# Altium PCB PCB2.PcbDoc
Units mm, origin at the board's own origin, x right, y up, seen from the top; angles counter-clockwise.
Board outline 21.59 x 58.8 mm, 2 copper layers (Top Layer, Bottom Layer); 29 components, 21 nets, 92 pads, 18 vias.
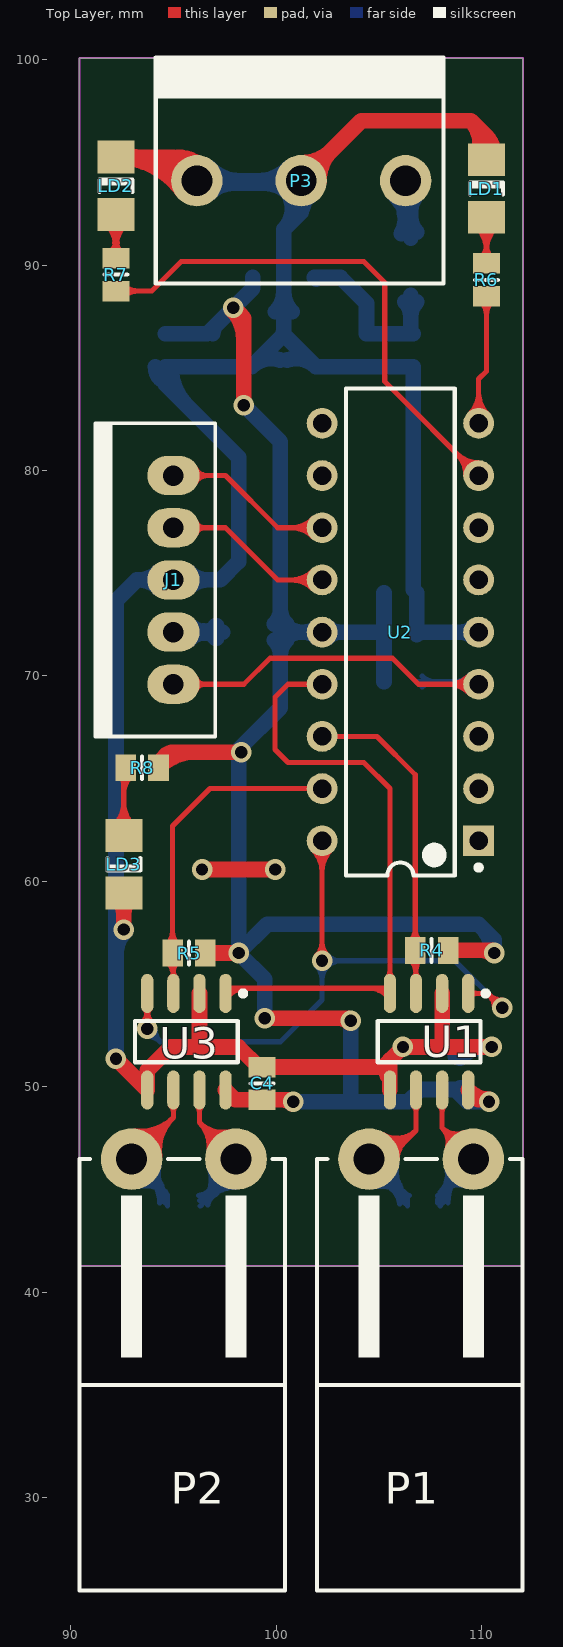
[diagram p0: Top Layer view]
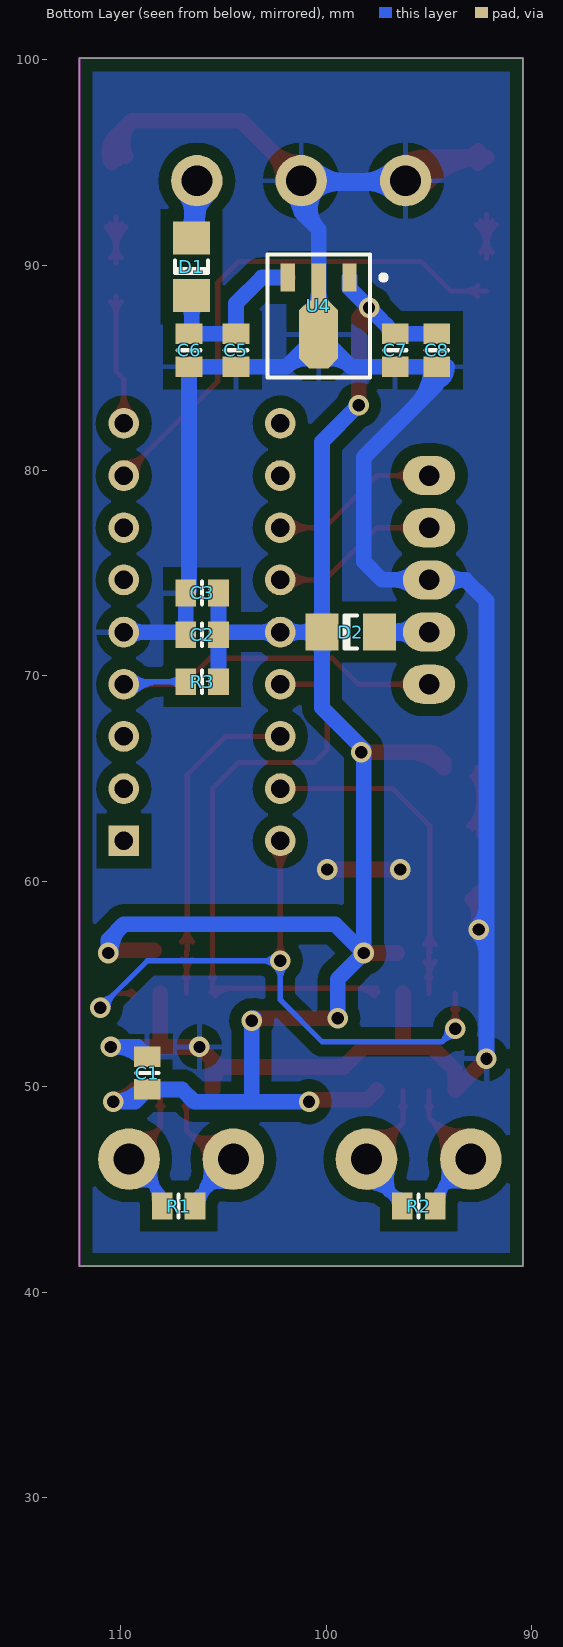
[diagram p1: Bottom Layer view, seen from below]

## Layer stack, top to bottom
Top Layer: signal copper 0.0356
Dielectric: dielectric 0.32, FR-4, Dk 4.8
Bottom Layer: signal copper 0.0356

## Board outline
90.424,100.076 90.424,41.275 112.014,41.275 112.014,100.076

## Design rules (kind name [scope] priority, off if disabled: settings)
Clearance [All] p1: gap=0.6
HoleToHoleClearance [All] p1 off: gap=0.254 allowstackedmicrovias=TRUE
MinimumSolderMaskSliver [All] p1 off: minsoldermaskwidth=0.254
PolygonConnect [All] p1: connectstyle=Relief reliefconductorwidth=0.254 reliefentries=4 polygonreliefangle="90 Angle"
RoutingVias [All] p1: holewidth=0.711 width=1.27 viastyle="Through Hole" minholewidth=0.711 minwidth=1.27 maxholewidth=0.711 maxwidth=1.27
SilkscreenOverComponentPads [All] p1 off: minsilkscreentomaskgap=0.254
SolderMaskExpansion [All] p1: expansion=0.102
Width [All] p1: maxlimit=1.27 minlimit=0.254 preferedwidth=0.254
25 further rules are at their usual default settings.

## Components (designator, comment, footprint, x,y, rotation, side; value= is the part's Value field where it differs from the comment)
C1 "Cap Semi" RESC2012L 108.712,50.673 r270 bottom
C2 "Cap Semi" RESC2012L 106.045,72.009 r180 bottom
C3 "Cap Semi" RESC2012L 106.045,74.041 r180 bottom
C4 "Cap Semi" RESC2012L 99.314,50.165 r270 top
C5 "Cap Semi" RESC2012L 104.394,85.852 r90 bottom
C6 "Cap Semi" RESC2012L 106.68,85.852 r90 bottom
C7 "Cap Semi" RESC2012L 96.647,85.852 r90 bottom
C8 "Cap Semi" RESC2012L 94.615,85.852 r90 bottom
D1 "1n4148" CD3216-1206 106.553,89.916 r270 bottom
D2 "1n4148" CD3216-1206 98.806,72.136 r0 bottom
J1 "programer" CON5 94.996,74.676 r270 top
LD1 "LH N974-KN-1" CD3216-1206 110.236,93.726 r90 top
LD2 "LH N974-KN-1" CD3216-1206 92.202,93.853 r90 top
LD3 "LH N974-KN-1" CD3216-1206 92.583,60.833 r270 top
P1 "Header 2" CON2 107.061,46.482 r0 top
P2 "Header 2" CON2 95.504,46.482 r0 top
P3 "" CONP3 96.139,94.107 r0 top
R1 "Res3" RESC2012L 107.188,44.196 r0 bottom
R2 "Res3" RESC2012L 95.504,44.196 r0 bottom
R3 "Res3" RESC2012L 106.045,69.723 r0 bottom
R4 "Res3" RESC2012L 107.569,56.642 r180 top
R5 "Res3" RESC2012L 95.758,56.515 r180 top
R6 "Res3" RESC2012L 110.236,89.281 r90 top
R7 "Res3" RESC2012L 92.202,89.535 r90 top
R8 "Res3" RESC2012L 93.472,65.532 r180 top
U1 "MAX485ESA" NSO8_L 107.442,52.197 r270 top
U2 "PIC18F1220-E/P" PDIP300-P18 106.045,72.136 r180 top
U3 "MAX485ESA" NSO8_L 95.631,52.197 r270 top
U4 "µA78L05ACPKR" PK03 100.368,88.011 r180 bottom

## Footprints (in the part's own frame and the unit in brackets; to place one, negate y for a bottom-side part, rotate by r counter-clockwise, add the part's x,y. Pads: shape width x height; smd on the part's side, far side on the other; paste and mask are expansions set on the pad)
CD3216-1206 [mm] "Chip Diode; Body 3.2 x 1.6 mm (LxW typ)"
  rect 1.6x1.8 smd: 1(-1.4,0) 2(1.4,0)
  silkscreen extent -0.3,-0.8 0.3,0.8
CON2 [mm]
  round 3 hole 1.5: 1(-2.54,0) 2(2.54,0)
  silkscreen extent -5.08,-21 4.92,0
CON5 [mm]
  oval 1.905x2.54 hole 1: 1(5.08,0) 2(2.54,0) 3(0,0) 4(-2.54,0) 5(-5.08,0)
  silkscreen extent -7.62,-3.81 7.62,2.03
CONP3 [mm]
  round 2.5 hole 1.5: 1(0,0) 2(5.08,0) 3(10.16,0)
  silkscreen extent -2,-5 12,6
NSO8_L [mm] "SOIC, 8-Leads, Body 4.9x3.9mm, Pitch 1.27mm, IPC High Density"
  oval 1.9x0.6 smd: 1(-2.35,1.905) 2(-2.35,0.635) 3(-2.35,-0.635) 4(-2.35,-1.905) 5(2.35,-1.905) 6(2.35,-0.635) 7(2.35,0.635) 8(2.35,1.905)
  silkscreen extent -2.47,-2.5 1,2.88, body extent -2,-2.5 2,2.5, height 1.75
PDIP300-P18 [mm] "DIP, 18-Leads, Row Spacing 7.62mm, Pitch 2.54mm, Body 22.9x6.6mm"
  rect 1.5x1.5 hole 0.9: 1(-3.81,10.16)
  round 1.5 hole 0.9: 2(-3.81,7.62) 3(-3.81,5.08) 4(-3.81,2.54) 5(-3.81,0) 6(-3.81,-2.54) 7(-3.81,-5.08) 8(-3.81,-7.62) 9(-3.81,-10.16) 10(3.81,-10.16) 11(3.81,-7.62) 12(3.81,-5.08) 13(3.81,-2.54) 14(3.81,0) 15(3.81,2.54) 16(3.81,5.08) 17(3.81,7.62) 18(3.81,10.16)
  silkscreen extent -3.94,-11.85 2.65,11.85, body extent -3.6,-11.8 3.6,11.8, height 5.34
PK03 [mm] "SOT-89; Body 4.6 x 4.25 mm, inc. leads (LxW max)"
  rect 0.7x1.35 smd: 1(1.5,1.388) 3(-1.5,1.388)
  rect 0.7x1.8 smd: 2(0,1.162)
  oct 1.9x3.3 smd: 4(0,-1.388)
  silkscreen extent -2.5,-3.49 3.27,2.51
RESC2012L [mm] "Chip Resistor, Body 2.0x1.3mm, IPC High Density"
  rect 1x1.3 smd: 1(-0.8,0) 2(0.8,0)
  silkscreen extent 0,-0.55 0,0.55, body extent -1.07,-0.7 1.07,0.7, height 0.65

## Part data
C1 C2 C3 C4 C5 C6 C7 C8: "Capacitor (Semiconductor SIM Model)"
D1 D2: library part 1N4148_SMD, "Schottky Diode"
J1: library part CON5, "Connector"
LD1 LD2 LD3: library part LEDRED1206, "LED CHIPLED 645NM RED DIFF 1206"
P1 P2: "Header, 2-Pin"
P3: library part "Header 3", "Header, 3-Pin"
R1 R2 R3 R4 R5 R6 R7 R8: "Resistor"
U1 U3: "Low-Power, Slew-Rate-Limited RS-485/RS-422 Transceiver"
U2: "High Performance, Enhanced Flash Microcontroller with 10-Bit A/D and nanoWatt Technology, 4K Flash, 18-Pin PDIP, Extended Temperature"
U4: "Positive-Voltage Regulator"

## Via types
v1: diameter 1, hole 0.6, Top Layer to Bottom Layer, 18 vias

## Nets (pads, with @x,y where several pads share a name; then routed paths per layer and width w, separated by ;. In a path a pad name is that pad's centre, name@x,y a point inside that pad or via, vN(x,y) a via of type N, cw(c..) or ccw(c..) an arc to the next point about the centre after c; other vN are vias at no path point)
DETEC1: U1.1 U2.18 U3.4 | length 45.7
  Top Layer w0.254: v1@93.462,53.096 ccw(c92.826,53.732) 93.726,53.732 ccw(c94.626,53.732) v1@93.99,53.096 ; U3.4@93.604,53.775 cw(c93.308,53.479) 93.726,53.479 cw(c94.144,53.479) U3.4@93.848,53.775 ; v1(93.726,52.832) U3.4 ; U2.18@101.794,61.535 cw(c100.731,60.472) 102.235,60.472 cw(c103.739,60.472) U2.18@102.676,61.535 ; v1@101.971,56.398 ccw(c101.335,57.034) 102.235,57.034 ccw(c103.135,57.034) v1@102.499,56.398 ; U2.18@101.974,61.715 cw(c101.344,61.085) 102.235,61.085 cw(c103.126,61.085) U2.18@102.496,61.715 ; v1(102.235,56.134) U2.18 ; U1.1 110.299,54.547 v1(110.998,53.848) ; U1.1@109.469,54.425 cw(c109.765,54.129) 109.765,54.547 cw(c109.765,54.965) U1.1@109.469,54.669 ; v1@110.625,53.848 ccw(c109.725,53.848) 110.361,54.485 ccw(c110.998,55.121) v1@110.998,54.221
  Bottom Layer w0.254: v1(93.726,52.832) 94.361,52.197 ; v1@93.727,52.459 cw(c93.729,51.565) 94.361,52.197 ; v1@94.099,52.831 ccw(c94.993,52.829) 94.361,52.197 ; v1@101.971,55.87 cw(c101.335,55.234) 102.235,55.234 cw(c103.135,55.234) 102.499,55.87 cw(c103.135,55.234) 103.135,56.134 cw(c103.135,57.034) v1@102.499,56.398 ; v1@110.625,53.848 ccw(c109.725,53.848) 110.361,54.485 ccw(c110.998,55.121) v1@110.998,54.221 ; v1(110.998,53.848) 108.712,56.134 v1(102.235,56.134) 102.235,54.229 100.203,52.197 94.361,52.197
DETEC2: U1.4 U2.15 U3.1 | length 32.9
  Top Layer w0.254: U3.1@97.479,54.604 cw(c97.954,54.129) 97.954,54.801 ; U3.1@97.536,54.801 105.537,54.801 105.537,64.516 104.267,65.786 100.584,65.786 99.949,66.421 99.949,68.961 100.584,69.596 U2.15 ; U3.1@97.658,54.425 cw(c98.567,53.516) 98.567,54.801 ; 104.506,54.801 cw(c104.506,53.516) U1.4@105.415,54.425 ; 105.119,54.801 cw(c105.119,54.129) U1.4@105.594,54.604 ; U1.4@105.415,55.319 ccw(c105.119,55.615) 105.537,55.615 ccw(c105.955,55.615) U1.4@105.659,55.319
DIR1: R4.2 U1.3 U2.16 | length 19.5
  Top Layer w0.254: U2.16 104.902,67.056 106.769,65.189 R4.2 106.807,56.604 U1.3 ; R4.2@106.505,56.228 cw(c105.777,55.5) 106.807,55.5 ; R4.2@106.505,57.056 ccw(c105.869,57.692) 106.769,57.692 ccw(c107.669,57.692) R4.2@107.033,57.056 ; U1.3@106.685,55.319 ccw(c106.389,55.615) 106.807,55.615 ccw(c107.225,55.615) U1.3@106.929,55.319 ; 106.807,55.683 cw(c107.578,55.683) R4.2@107.033,56.228
DIR2: R5.2 U2.17 U3.3 | length 21
  Top Layer w0.254: R5.2@94.694,56.101 cw(c93.966,55.373) U3.3@94.996,55.373 ; R5.2@94.694,56.929 ccw(c94.058,57.565) 94.958,57.565 ccw(c95.858,57.565) R5.2@95.222,56.929 ; R5.2@94.838,57.018 ccw(c94.763,57.239) 94.996,57.239 ; U3.3@94.874,55.319 ccw(c94.578,55.615) 94.996,55.615 ccw(c95.414,55.615) U3.3@95.118,55.319 ; R5.2 94.958,62.7 96.774,64.516 U2.17 ; U3.3 94.996,57.239 ; 94.996,55.556 cw(c95.767,55.556) R5.2@95.222,56.101 ; R5.2@95.141,56.99 cw(c95.282,57.239) 94.996,57.239
GND: C1.1 C2.1 C3.1 C4.1 C5.1 C6.1 C7.1 C8.1 J1.3 LD1.2 LD2.2 LD3.2 P3.1 P3.2 U1.2 U1.5 U2.5 U3.2 U3.5 U4.2 U4.4 | length 198.3
  Top Layer w0.762: v1(92.202,51.371) U3.5 93.726,50.8 94.869,51.943 96.139,51.943 ; LD3.2@92.287,59.137 cw(c91.571,58.421) 92.583,58.421 cw(c93.595,58.421) LD3.2@92.879,59.137 ; v1(92.583,57.658) LD3.2 ; LD2.2@92.598,94.957 cw(c93.314,94.241) 93.314,95.253 cw(c93.314,96.265) LD2.2@92.598,95.549 ; 93.691,95.253 cw(c93.691,92.342) P3.1@96.052,94.044 ; 95.18,95.253 cw(c95.18,93.415) P3.1@96.67,94.49 ; P3.1@95.287,94.279 ccw(c94.232,94.492) 94.993,95.253 ; P3.1@95.434,93.599 ccw(c92.202,91.269) LD2.2 94.993,95.253 ; P3.1@95.967,94.959 cw(c95.754,96.014) 94.993,95.253 ; P3.1 94.993,95.253 ; U3.2 96.266,52.07 96.139,51.943 ; v1(96.393,60.579) v1(99.949,60.579) ; P3.2 104.14,97.028 109.474,97.028 ; P3.2@101.219,94.976 ccw(c101.219,97.074) 102.702,95.59 ccw(c104.186,94.107) P3.2@102.088,94.107 ; U1.5@105.472,50.449 cw(c106.004,50.841) 105.537,51.308 ; U1.5 105.537,51.308 ; U1.2 108.077,51.943 ; LD1.2@109.76,95.31 ccw(c108.415,95.969) 109.474,97.028 ; LD1.2@109.94,95.422 ccw(c109.224,96.138) 110.236,96.138 ccw(c111.248,96.138) LD1.2@110.532,95.422 ; 110.228,96.274 cw(c109.427,95.473) LD1.2@110.444,94.975 ; LD1.2 110.236,96.266 109.474,97.028 ; v1(110.49,51.943) 108.077,51.943 ; 96.139,51.943 98.171,51.943 99.149,50.965 C4.1 105.194,50.965 105.537,51.308 ; 105.537,51.308 v1(106.172,51.943) 108.077,51.943
  Bottom Layer w0.762: v1(92.202,51.371) 92.202,73.66 93.218,74.676 J1.3 97.282,74.676 98.171,75.565 98.171,80.645 94.615,84.201 C8.1 C7.1 98.797,85.052 ; 92.202,56.451 cw(c93.79,56.451) v1@92.667,57.574 ; 92.202,58.865 ccw(c93.79,58.865) v1@92.667,57.742 ; C8.1@94.122,85.052 ccw(c94.986,85.052) 94.375,84.441 ; J1.3@94.274,74.272 ccw(c93.299,73.296) 93.299,74.676 ccw(c93.299,76.056) J1.3@94.274,75.08 ; C8.1@94.884,85.052 ccw(c97.588,85.052) 95.676,83.14 ; P3.1@95.377,93.98 100.457,93.98 P3.2@100.33,93.853 ; J1.3@95.718,74.272 cw(c96.693,73.296) 96.693,74.676 cw(c96.693,76.056) J1.3@95.718,75.08 ; P3.1 P3.2 101.219,92.583 ; 97.93,93.98 ccw(c97.93,92.316) 96.753,93.493 cw(c98.237,92.009) 98.237,94.107 cw(c98.237,96.205) 96.753,94.721 ccw(c98.544,96.512) 98.544,93.98 ; 98.814,93.98 ccw(c98.814,96.512) 100.605,94.721 cw(c99.121,96.205) 99.121,94.107 cw(c99.121,92.009) 100.605,93.493 ccw(c99.428,92.316) 99.428,93.98 ; U4.4@99.966,87.726 ccw(c98.994,88.697) 100.368,88.697 ccw(c101.742,88.697) U4.4@100.77,87.726 ; U4.4@100.19,85.383 ccw(c99.762,84.087) 98.797,85.052 ; P3.2@100.516,93.597 cw(c99.349,92.751) 100.368,91.732 ; U4.4@100.546,85.383 cw(c100.974,84.087) 101.94,85.052 ; P3.2@100.776,93.359 cw(c100.317,92.583) 101.219,92.583 ; 100.999,92.363 ccw(c100.081,93.282) P3.2@101.132,94.044 ; P3.2@101.662,93.359 ccw(c102.121,92.583) 101.219,92.583 ; C1.1 109.182,51.943 v1(110.49,51.943) ; C1.1@108.946,51.389 cw(c110.284,50.051) v1@110.284,51.943 ; U2.5@109.594,71.875 ccw(c108.964,71.245) 108.964,72.136 ccw(c108.964,73.027) U2.5@109.594,72.397 ; U2.5 106.972,72.136 C2.1 C3.1 106.68,74.206 C6.1 C5.1 101.94,85.052 ; 98.797,85.052 U4.4 ; U4.4 101.94,85.052 ; U4.4 100.33,86.662 100.368,86.7 U4.2 100.368,91.732 ; 100.368,91.732 101.219,92.583
NetC5_2: C5.2 C6.2 D1.2 U4.3 | length 10.4
  Bottom Layer w0.762: U4.3@101.953,89.313 U4.3 103.133,89.399 104.394,88.138 C5.2 C6.2 106.553,86.779 D1.2 ; D1.2@106.257,88.22 cw(c105.541,87.504) 106.553,87.504 cw(c107.565,87.504) D1.2@106.849,88.22
NetD1_1: D1.1 P3.3 | length 8.9
  Bottom Layer w0.762: P3.3@105.685,93.493 cw(c103.588,91.396) D1.1@106.553,91.396 ; D1.1@106.09,91.525 ccw(c104.867,92.231) 106.231,92.597 ; D1.1@106.257,91.612 ccw(c105.541,92.328) 106.553,92.328 ccw(c107.565,92.328) D1.1@106.849,91.612 ; P3.3 106.553,93.853 D1.1 ; 106.553,92.622 cw(c107.784,92.622) P3.3@106.913,93.493
NetD2_1: D2.1 J1.2 | length 7.5
  Bottom Layer w0.762: J1.2 D2.1 ; J1.2@95.718,71.732 cw(c96.693,70.756) 96.693,72.136 cw(c96.693,73.516) J1.2@95.718,72.54 ; 96.474,72.077 cw(c96.602,71.597) D2.1@97.038,71.835 ; 96.474,72.195 ccw(c96.602,72.675) D2.1@97.038,72.437 ; D2.1@97.11,71.84 ccw(c96.394,71.124) 96.394,72.136 ccw(c96.394,73.148) D2.1@97.11,72.432
NetLD1_1: LD1.1 R6.2 | length 7.8
  Top Layer w0.254: LD1.1@109.76,91.85 cw(c108.611,90.701) 110.236,90.701 cw(c111.861,90.701) LD1.1@110.712,91.85 ; LD1.1@109.94,92.03 cw(c109.224,91.314) 110.236,91.314 cw(c111.248,91.314) LD1.1@110.532,92.03 ; R6.2@109.972,90.345 ccw(c109.336,90.981) 110.236,90.981 ccw(c111.136,90.981) R6.2@110.5,90.345 ; R6.2 LD1.1
NetLD2_1: LD2.1 R7.2 | length 8.7
  Top Layer w0.254: LD2.1@91.726,91.977 cw(c90.577,90.828) 92.202,90.828 cw(c93.827,90.828) LD2.1@92.678,91.977 ; LD2.1@91.906,92.157 cw(c91.19,91.441) 92.202,91.441 cw(c93.214,91.441) LD2.1@92.498,92.157 ; R7.2@91.926,90.686 ccw(c91.813,91.003) 92.14,91.083 ; R7.2@91.938,90.599 ccw(c91.302,91.235) 92.202,91.235 ccw(c93.102,91.235) R7.2@92.466,90.599 ; R7.2 LD2.1 ; 92.264,91.083 ccw(c92.591,91.003) R7.2@92.478,90.686
NetLD3_1: LD3.1 R8.2 | length 9.4
  Top Layer w0.254: LD3.1@92.107,62.709 ccw(c90.958,63.858) 92.583,63.858 ccw(c94.208,63.858) LD3.1@93.059,62.709 ; LD3.1@92.287,62.529 ccw(c91.571,63.245) 92.583,63.245 ccw(c93.595,63.245) LD3.1@92.879,62.529 ; R8.2@92.408,65.118 cw(c91.986,64.696) 92.583,64.696 ; LD3.1 92.583,65.443 R8.2 ; 92.583,64.267 cw(c93.787,64.267) R8.2@92.936,65.118 ; 92.583,64.88 cw(c93.174,64.88) R8.2@92.756,65.298
NetP1_1: P1.1 R1.1 U1.6 | length 30
  Top Layer w0.254: P1.1 105.41,46.482 106.807,47.879 ; P1.1@104.827,47.011 ccw(c105.358,47.926) 106.106,47.178 ; P1.1@104.955,47.23 ccw(c105.529,48.222) 106.34,47.412 ; P1.1@105.082,47.45 ccw(c105.701,48.518) 106.573,47.645 ; P1.1@105.209,47.67 ccw(c105.872,48.814) 106.807,47.879 ; P1.1@105.894,46.482 cw(c107.062,46.482) 106.236,47.308 ; U1.6@106.685,49.075 cw(c106.389,48.779) 106.807,48.779 cw(c107.225,48.779) U1.6@106.929,49.075 ; U1.6 106.807,47.879
  Bottom Layer w0.254: P1.1 R1.1@106.388,44.615 ; P1.1@104.67,45.63 cw(c104.872,44.481) 105.697,45.306 cw(c106.522,46.131) P1.1@105.373,46.333 ; P1.1@104.714,45.38 cw(c104.975,43.893) 106.043,44.96 cw(c107.11,46.028) P1.1@105.623,46.289 ; P1.1@104.758,45.13 cw(c105.078,43.306) R1.1@106.388,44.615 ; 105.441,45.162 cw(c104.854,44.145) R1.1@106.018,44.298 ; P1.1@105.561,45.442 cw(c104.465,44.346) R1.1@106.015,44.346 ; P1.1@105.873,46.245 ccw(c107.697,45.925) R1.1@106.388,44.615 ; 105.887,44.904 cw(c105.497,44.229) R1.1@106.27,44.331 ; 105.947,45.378 cw(c104.992,44.826) R1.1@106.035,44.467 ; 105.995,45.008 cw(c105.332,44.346) R1.1@106.269,44.346 ; 106.217,44.912 ccw(c106.599,45.133) R1.1@106.485,44.706 ; 106.226,44.895 cw(c105.691,44.586) R1.1@106.275,44.385 ; R1.1 R1.1@106.388,44.615
NetP1_2: P1.2 R1.2 U1.7 | length 20.6
  Top Layer w0.254: U1.7@107.955,49.075 cw(c107.659,48.779) 108.077,48.779 cw(c108.495,48.779) U1.7@108.199,49.075 ; U1.7 108.077,48.006 ; P1.2@108.311,46.952 ccw(c107.366,47.295) 108.077,48.006 ; P1.2@108.549,46.865 ccw(c107.78,47.145) 108.359,47.724 ccw(c108.938,48.303) P1.2@109.218,47.534 ; P1.2@109.131,47.772 cw(c108.788,48.717) 108.077,48.006 ; P1.2 108.077,48.006
  Bottom Layer w0.254: R1.2@107.853,44.346 cw(c108.79,44.346) 108.127,45.008 ; R1.2@107.867,44.699 ccw(c107.808,44.869) 107.988,44.869 ; R1.2 107.988,44.869 ; R1.2@108.107,44.346 cw(c109.657,44.346) P1.2@108.561,45.442 ; R1.2@108.109,44.699 cw(c108.168,44.869) 107.988,44.869 ; P1.2@108.289,46.079 cw(c107.134,45.723) 107.988,44.869 ; R1.2@108.361,44.346 cw(c110.524,44.346) P1.2@108.995,45.876 ; P1.2@108.531,46.153 cw(c107.59,45.864) 108.286,45.167 cw(c108.983,44.471) P1.2@109.272,45.412 ; P1.2@109.198,45.17 ccw(c108.842,44.015) 107.988,44.869 ; P1.2 107.988,44.869
NetP2_1: P2.1 R2.1 U3.6 | length 30.2
  Top Layer w0.254: P2.1 94.996,48.514 ; P2.1@93.056,47.342 ccw(c93.21,48.796) 94.244,47.762 ccw(c95.278,46.728) P2.1@93.824,46.574 ; P2.1@93.082,47.595 ccw(c93.283,49.475) 94.62,48.138 ccw(c95.957,46.801) P2.1@94.077,46.6 ; P2.1@93.109,47.847 ccw(c93.355,50.155) 94.996,48.514 ; P2.1@94.329,46.627 cw(c96.637,46.873) 94.996,48.514 ; U3.6@94.874,49.075 cw(c94.578,48.779) 94.996,48.779 cw(c95.414,48.779) U3.6@95.118,49.075 ; U3.6 94.996,48.514
  Bottom Layer w0.254: P2.1 R2.1@94.704,44.742 ; P2.1@93.163,45.64 cw(c93.384,44.709) 94.06,45.386 cw(c94.737,46.062) P2.1@93.806,46.283 ; P2.1@93.222,45.393 cw(c93.507,44.189) 94.382,45.064 cw(c95.257,45.939) P2.1@94.053,46.224 ; P2.1@93.28,45.146 cw(c93.63,43.668) R2.1@94.704,44.742 ; P2.1@93.787,45.659 cw(c92.474,44.346) R2.1@94.331,44.346 ; 94.215,45.024 cw(c93.844,44.382) R2.1@94.585,44.351 ; 94.221,45.225 cw(c93.342,44.346) R2.1@94.585,44.346 ; P2.1@94.3,46.166 ccw(c95.778,45.816) R2.1@94.704,44.742 ; 94.368,45.324 cw(c93.663,44.917) R2.1@94.377,44.525 ; 94.594,44.933 cw(c94.126,44.663) R2.1@94.6,44.403 ; R2.1 R2.1@94.704,44.742
NetP2_2: P2.2 R2.2 U3.7 | length 31.1
  Top Layer w0.254: U3.7@96.144,49.075 cw(c95.848,48.779) 96.266,48.779 cw(c96.684,48.779) U3.7@96.388,49.075 ; U3.7 96.266,48.26 ; P2.2@96.702,46.774 ccw(c95.124,47.117) 96.266,48.26 ; P2.2@96.951,46.72 ccw(c95.664,47) 96.595,47.931 ccw(c97.526,48.862) P2.2@97.806,47.575 ; P2.2@97.199,46.666 ccw(c96.204,46.882) 96.924,47.602 ccw(c97.644,48.322) P2.2@97.86,47.327 ; P2.2@97.752,47.824 cw(c97.409,49.402) 96.266,48.26 ; P2.2 96.266,48.26
  Bottom Layer w0.254: R2.2@96.236,44.713 ccw(c96.016,45.901) 97.062,45.297 ; R2.2@96.275,44.718 ccw(c96.224,45.374) 96.794,45.045 ; R2.2@96.282,44.463 ccw(c96.148,45.188) R2.2@96.787,44.82 ; R2.2@96.304,44.465 ccw(c96.304,45.114) R2.2@96.763,44.655 ; R2.2@96.304,44.719 ccw(c96.304,45.982) 97.197,45.089 ; R2.2@96.397,44.707 ccw(c96.632,45.625) 97.115,44.81 ; R2.2@96.595,44.487 ccw(c95.46,45.621) P2.2@96.982,46.128 ; R2.2@96.632,44.524 cw(c98.044,43.112) P2.2@98.044,45.109 ; R2.2@96.665,44.253 cw(c97.492,44.041) 97.057,44.776 ; R2.2@96.664,44.443 cw(c97.287,44.609) 96.729,44.931 ; R2.2@96.677,44.346 cw(c97.215,44.346) 96.835,44.727 ; P2.2@96.741,46.048 cw(c95.024,45.476) R2.2 98.044,45.936 P2.2 ; 96.885,44.777 ccw(c95.896,45.766) P2.2@97.223,46.209 ; 97.066,44.958 cw(c98.044,43.98) P2.2@98.044,45.363 ; 97.176,45.068 ccw(c96.332,45.912) P2.2@97.464,46.289
NetR6_1: R6.1 U2.9 | length 11.5
  Top Layer w0.254: U2.9@109.414,82.737 ccw(c108.351,83.8) 109.855,83.8 ccw(c111.359,83.8) U2.9@110.296,82.737 ; U2.9@109.594,82.557 ccw(c108.964,83.187) 109.855,83.187 ccw(c110.746,83.187) U2.9@110.116,82.557 ; U2.9 109.855,84.455 110.236,84.836 R6.1 ; R6.1@109.972,88.217 cw(c109.336,87.581) 110.236,87.581 cw(c111.136,87.581) R6.1@110.5,88.217
NetR7_1: R7.1 U2.8 | length 30.6
  Top Layer w0.254: R7.1 93.942,88.735 95.377,90.17 104.267,90.17 105.283,89.154 105.283,84.328 U2.8 ; R7.1@92.616,88.471 cw(c93.252,87.835) 93.252,88.735 cw(c93.252,89.636) R7.1@92.616,88.999 ; U2.8@109.232,79.756 ccw(c107.728,79.756) 108.791,80.82 ccw(c109.855,81.883) U2.8@109.855,80.379 ; U2.8@109.486,79.756 ccw(c108.595,79.756) 109.225,80.386 ccw(c109.855,81.016) U2.8@109.855,80.125
PGC: J1.5 U2.12 | length 13.5
  Top Layer w0.254: J1.5 97.536,79.756 100.076,77.216 U2.12 ; J1.5@96.052,79.388 cw(c96.647,79.092) 96.647,79.756 cw(c96.647,80.42) J1.5@96.052,80.124 ; U2.12@101.794,76.775 ccw(c100.731,75.712) 100.731,77.216 ccw(c100.731,78.72) U2.12@101.794,77.657 ; U2.12@101.974,76.955 ccw(c101.344,76.325) 101.344,77.216 ccw(c101.344,78.107) U2.12@101.974,77.477
PGD: J1.4 U2.13 | length 13.2
  Top Layer w0.254: J1.4 97.536,77.216 100.076,74.676 U2.13 ; J1.4@96.083,76.917 cw(c96.52,76.747) 96.52,77.216 cw(c96.52,77.685) J1.4@96.083,77.515 ; U2.13@101.794,74.235 ccw(c100.731,73.172) 100.731,74.676 ccw(c100.731,76.18) U2.13@101.794,75.117 ; U2.13@101.974,74.415 ccw(c101.344,73.785) 101.344,74.676 ccw(c101.344,75.567) U2.13@101.974,74.937
RST: J1.1 R3.2 U2.4 | length 28.5
  Top Layer w0.254: J1.1 98.425,69.596 99.695,70.866 105.664,70.866 106.934,69.596 U2.4 ; J1.1@96.083,69.297 cw(c96.52,69.127) 96.52,69.596 cw(c96.52,70.065) J1.1@96.083,69.895 ; U2.4@109.414,69.155 ccw(c108.351,68.092) 108.351,69.596 ccw(c108.351,71.1) U2.4@109.414,70.037 ; U2.4@109.594,69.335 ccw(c108.964,68.705) 108.964,69.596 ccw(c108.964,70.487) U2.4@109.594,69.857
  Bottom Layer w0.254: R3.2 U2.4@109.728,69.723 ; R3.2@107.109,69.459 cw(c107.745,68.823) 107.745,69.723 cw(c107.745,70.623) R3.2@107.109,69.987 ; 108.044,69.723 cw(c108.044,67.785) U2.4@109.414,69.155 ; U2.4@109.414,70.037 cw(c108.658,70.793) 108.658,69.723 cw(c108.658,68.399) U2.4@109.594,69.335
VCC: C1.2 C2.2 C3.2 C4.2 C7.2 C8.2 D2.2 R3.1 R4.1 R5.1 R8.1 U1.8 U2.14 U3.8 U4.1 | length 116.9
  Top Layer w0.762: R8.1 95.034,66.294 ; R8.1@94.272,65.801 ccw(c94.272,66.45) R8.1@94.731,65.991 ; R8.1@94.356,65.598 cw(c96.037,63.917) 96.037,66.294 ; R8.1@94.391,65.677 cw(c95.034,65.65) 95.034,66.294 ; R5.1 v1(98.171,56.515) ; U3.8 98.018,49.365 C4.2 100.749,49.365 v1(100.838,49.276) ; v1@97.833,87.838 cw(c96.403,86.408) 98.425,86.408 ; v1@97.901,87.804 cw(c97.819,87.204) 98.425,87.204 ; v1(97.917,87.922) 98.425,87.414 v1(98.425,83.185) ; v1(98.298,66.294) 95.034,66.294 ; v1(99.441,53.34) 103.505,53.34 v1(103.632,53.213) ; 100.336,49.365 cw(c100.336,48.774) v1@100.754,49.192 ; 103.038,53.34 cw(c103.038,52.619) v1@103.548,53.129 ; R4.1 110.49,56.642 v1(110.617,56.515) ; U1.8 109.829,49.365 ; U1.8@109.4,49.794 ccw(c110.363,50.757) v1@110.363,49.395 ; 110.023,56.642 cw(c110.023,55.921) v1@110.533,56.431
  Bottom Layer w0.762: C8.2 C7.2 v1(97.917,87.922) 98.868,88.873 U4.1 ; C7.2@96.916,86.652 cw(c97.565,86.652) C7.2@97.106,87.111 ; v1(98.425,83.185) 100.206,81.404 D2.2 ; v1(99.441,53.34) 99.441,55.245 v1(98.171,56.515) ; D2.2@99.91,71.74 cw(c99.194,71.024) 100.206,71.024 cw(c101.218,71.024) D2.2@100.502,71.74 ; D2.2@99.91,72.532 ccw(c99.194,73.248) 100.206,73.248 ccw(c101.218,73.248) D2.2@100.502,72.532 ; D2.2@100.502,71.84 cw(c101.218,71.124) 101.218,72.136 cw(c101.218,73.148) D2.2@100.502,72.432 ; v1(100.838,49.276) 103.632,49.276 ; U2.14@101.974,71.875 ccw(c101.344,71.245) 101.344,72.136 ccw(c101.344,73.027) U2.14@101.974,72.397 ; U2.14@102.496,71.875 cw(c103.126,71.245) 103.126,72.136 cw(c103.126,73.027) U2.14@102.496,72.397 ; v1@103.505,53.34 v1(103.632,53.213) 103.632,49.276 ; R3.1 C2.2 C2.2@105.118,72.136 ; C3.2 105.245,72.263 C2.2@105.118,72.136 ; C1.2@108.954,49.948 ccw(c110.363,51.088) v1(110.363,49.276) 109.309,49.276 C1.2 107.023,49.873 106.426,49.276 103.632,49.276 ; C1.2@108.981,49.873 ccw(c109.63,49.873) C1.2@109.171,49.414 ; 109.965,57.802 cw(c108.678,56.515) v1@110.498,56.515 ; v1(110.617,56.515) 110.617,57.15 109.855,57.912 99.568,57.912 v1(98.171,56.515) ; v1(98.171,56.515) 98.171,66.421 100.206,68.456 D2.2 ; D2.2 U2.14 C2.2@105.118,72.136
pads on no net: U2.1 U2.2 U2.3 U2.6 U2.7 U2.10 U2.11

## Polygon pours and split planes (outlines as drawn)
GND on Bottom Layer "Bottom Layer-No Net" (solid, pour order 2): 90.424,100.076 90.424,41.275 112.014,41.275 112.014,100.076

## Keep-outs
Keep-Out Layer:
  lines w0.1: 90.424,41.275 112.014,41.275 112.014,100.076 111.887,100.076 90.424,100.076 90.424,41.275